# Altium PCB Pulser_10-2023.PcbDoc (part 2 of 2)
Units mm, origin at the board's own origin, x right, y up, seen from the top; angles counter-clockwise.
Board outline 57.93 x 43.58 mm, 4 copper layers (Top Layer, Int1 (GND), Int2 (Power), Bottom Layer), stack 1.56 mm thick; 123 components, 91 nets, 416 pads, 251 vias.
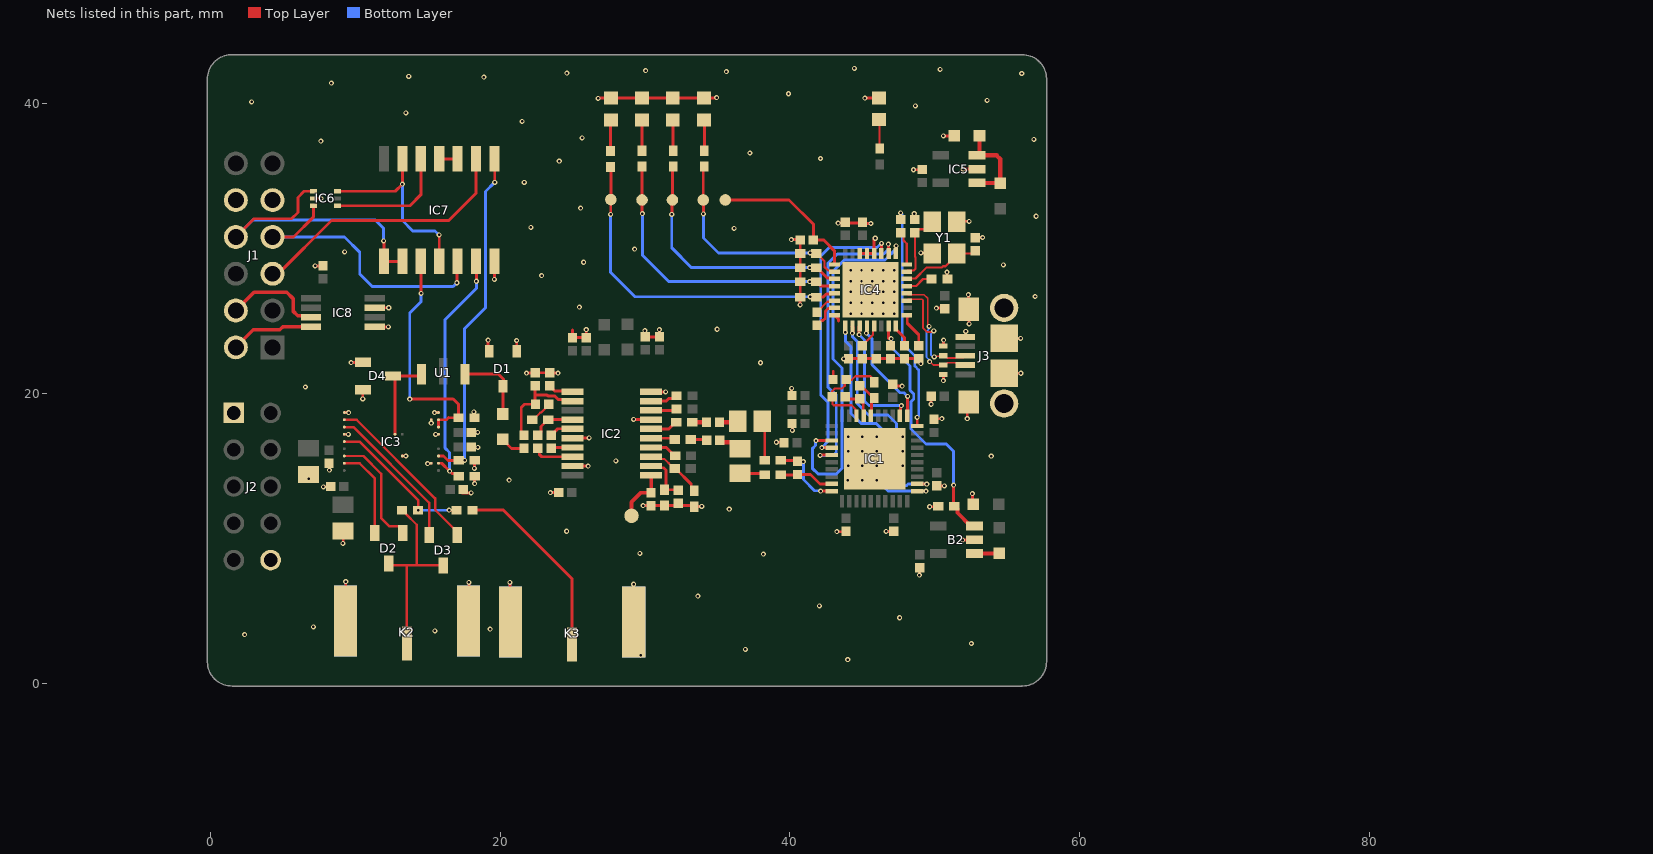
[diagram p4: the nets of this part, all layers, seen from the top]

## Via types
v1: diameter 0.35, hole 0.17, Top Layer to Bottom Layer, tented both sides, 251 vias

## Nets (pads, with @x,y where several pads share a name; then routed paths per layer and width w, separated by ;. In a path a pad name is that pad's centre, name@x,y a point inside that pad or via, vN(x,y) a via of type N, cw(c..) or ccw(c..) an arc to the next point about the centre after c; other vN are vias at no path point) (continued)
GND: B2.2 C1.1 C2.1 C3.2 C4.2 C6.2 C7.1 C10.1 C11.2 C12.2 C13.1 C14.1 C19.1 C20.1 C21.2 C23.1 C24.1 C25.1 C26.1 C27.1 C29.2 C30.2 C31.1 C32.1 C33.1 C34.2 C35.2 C36.1 C39.1 C41.1 C42.2 C43.2 C44.2 C45.2 C46.1 C49.2 C50.2 C51.2 C52.1 C53.1 C54.2 C55.2 C56.2 C58.1 D1.1 D1.2 D4.1 D4.2 D5.1 D6.1 IC1.41 IC2.6 IC2.9 IC2.17 IC2.20 IC3.A1 IC3.A4 IC3.B2 IC3.B8 IC3.F7 IC3.P1 IC3.P4 IC4.8 IC4.28 IC4.29 IC4.30 IC4.33 IC5.2 IC6.2 IC7.7 IC8.5 IC8.7 J1.9 J1.10 J2.1 J2.10 J3.5 J3.MH1 J3.MH2 J3.MP1 J3.MP2 J3.MP3 J3.MP4 K2.2 K3.2 LED1.1 LED2.1 LED3.1 LED4.1 LED5.1 R2.1 R3.2 R4.2 R5.1 R8.2 R12.2 R13.2 R20.2 R21.2 R22.2 R23.2 Y1.2 Y1.4 | length 94.7
  Top Layer w0.2: C50.2@6.775,14.4 6.8,14.375 v1(6.8,14.1) ; IC6.2@7.112,33.452 v1(7.645,33.452) ; v1(7.239,28.804) 7.771,28.804 C6.2@7.775,28.8 ; v1(7.8,13.55) 8.275,13.55 C53.1@8.3,13.575 ; C52.1@8.2,15.175 8.225,15.15 v1(8.225,14.7) ; v1(9.15,9.65) 9.175,9.675 C51.2@9.175,10.5 ; IC3.P4@9.25,17.175 v1(9.525,17.175) ; IC3.P1@9.25,18.675 v1(9.55,18.675) ; K2.2@9.325,4.3 9.35,4.325 v1(9.35,7) ; v1(9.725,22.125) 10.49,22.125 D4.1@10.525,22.16 ; v1(10.525,19.625) D4.2@10.525,20.24 ; IC8.5@11.35,24.6 11.363,24.587 v1(12.294,24.587) ; IC8.7@11.35,25.9 11.358,25.908 v1(12.319,25.908) ; IC3.F7@13.25,15.675 v1(13.5,15.675) ; v1(15,15.15) 15.025,15.175 IC3.B8@15.25,15.175 ; v1(15.25,17.95) IC3.B2@15.25,18.175 ; v1(15.475,18.675) IC3.A1@15.75,18.675 ; v1(15.55,17.175) IC3.A4@15.75,17.175 ; C56.2@17.29,13.208 17.366,13.132 v1(18.009,13.132) ; K2.2@17.825,4.3 17.85,4.325 v1(17.85,6.95) ; C55.2@18.025,16.3 18.05,16.275 v1(18.475,16.275) ; C54.2@18.025,17.3 v1(18.45,17.3) ; v1(18.2,18.725) 18.2,18.35 R23.2@18.225,18.325 ; v1(18.225,14.825) 18.225,15.35 R22.2@18.25,15.375 ; v1(18.25,13.775) R21.2@18.25,14.275 ; v1(19.175,23.675) 19.175,22.975 D1.2@19.25,22.9 ; v1(19.609,27.864) v1(19.609,27.864) IC7.7@19.61,29.112 ; v1(20.675,6.95) 20.675,4.275 K3.2@20.725,4.225 ; D1.1@21.15,22.9 v1(21.15,23.65) ; v1(21.825,21.4) 22.4,21.4 C10.1@22.425,21.425 C7.1@23.425,21.425 23.45,21.4 v1(24,21.4) ; v1(23.475,13.15) C19.1@24.05,13.15 ; IC2.9@24.985,14.985 26.065,14.985 v1(26.075,14.975) ; IC2.6@24.985,16.905 26.13,16.905 v1(26.15,16.925) ; 25,24.375 C25.1@25,23.85 C24.1@25.95,23.85 v1(25.95,24.4) ; v1(26.772,40.361) 26.786,40.375 LED4.1@27.65,40.375 LED3.1@29.8,40.375 LED2.1@31.925,40.375 LED1.1@34.075,40.375 34.85,40.375 34.858,40.383 34.922,40.383 v1(34.95,40.411) ; v1(29.225,18.2) 29.24,18.185 IC2.17@30.415,18.185 ; v1(29.875,12.25) C21.2@30.425,12.25 33.325,12.25 R20.2@33.4,12.175 33.425,12.2 v1(33.925,12.2) ; v1(30,24.325) 30,23.925 C27.1@30.025,23.9 C26.1@31,23.9 v1(31,24.4) ; IC2.20@30.415,20.105 30.42,20.1 v1(31.425,20.1) ; v1(39.075,16.625) 39.575,16.625 C4.2@39.6,16.6 ; v1(40.107,30.607) 40.698,30.607 C13.1@40.723,30.582 40.725,30.58 R3.2@40.725,29.65 R4.2@40.725,28.675 R5.1@40.725,27.7 R12.2@40.725,26.625 40.716,26.616 v1(40.716,26.111) ; v1(40.125,20.35) 40.125,19.875 C11.2@40.15,19.85 ; C12.2@40.15,17.925 40.175,17.9 v1(40.175,17.45) ; C23.1@43,20.825 43,21.5 ; IC4.8@43.075,25.4 43.358,25.117 43.358,24.994 ; v1(43.25,10.45) 43.85,10.45 C14.1@43.875,10.475 ; v1(43.332,31.75) 44.975,31.75 C2.1@45.025,31.8 45.1,31.725 v1(45.593,31.725) ; v1(43.713,22.377) 43.827,22.377 43.95,22.5 C35.2@44.05,22.4 C42.2@45,22.4 C43.2@45.975,22.4 C44.2@46.95,22.4 C45.2@47.925,22.4 C30.2@48.9,22.4 48.928,22.428 49.047,22.309 v1(49.047,22.047) ; IC4.30@44.825,29.65 IC4.29@45.325,29.65 IC4.28@45.825,29.65 45.825,30.636 v1(45.898,30.709) ; v1(45.187,40.386) 45.201,40.4 LED5.1@46.15,40.4 ; v1(46.65,10.475) C39.1@47.175,10.475 ; C29.2@47.1,20.425 47.175,20.5 v1(47.75,20.5) ; v1(48.539,35.433) 49.127,35.433 C34.2@49.148,35.453 ; v1(48.59,32.41) 48.59,32.035 C31.1@48.625,32 ; v1(48.95,7.45) 48.95,7.925 C49.2@48.975,7.95 ; v1(49.047,29.693) 49.782,29.693 Y1.4@49.825,29.65 ; v1(49.65,12.175) 50.225,12.175 R13.2@50.25,12.2 ; v1(49.75,19.25) 49.75,19.775 C58.1@49.775,19.8 ; C36.1@49.95,18.2 50,18.25 v1(50.5,18.25) ; C41.1@49.975,13.625 49.986,13.614 v1(50.673,13.614) ; v1(50.114,25.883) 50.667,25.883 C3.2@50.7,25.85 ; v1(50.597,20.879) 50.597,21.292 D6.1@50.6,21.295 ; v1(50.597,37.77) 50.605,37.778 C46.1@51.348,37.778 ; D5.1@50.6,23.255 50.622,23.277 v1(50.622,23.673) ; v1(50.851,28.372) 50.851,27.924 R2.1@50.875,27.9 ; Y1.2@51.525,31.85 51.552,31.877 v1(52.375,31.877) ; v1(51.925,9.875) 52.725,9.875 B2.2@52.75,9.9 ; v1(51.968,35.458) 51.988,35.478 IC5.2@52.923,35.478 ; J3.5@52.12,23.9 52.146,23.926 v1(52.146,24.282) ; v1(52.25,18.25) 52.25,19.305 J3.MP1@52.345,19.4 ; v1(52.324,26.822) 52.324,25.821 J3.MP2@52.345,25.8 52.375,25.77 v1(52.375,24.79) ; v1(52.6,13.075) 52.6,12.425 C33.1@52.675,12.35 ; C32.1@52.8,30.75 52.809,30.759 v1(53.315,30.759) ; J3.MP3@54.795,21.4 54.808,21.387 v1(55.956,21.387) ; J3.MP4@54.795,23.8 v1(55.931,23.8)
  Bottom Layer w0.2: K2.2@9.325,4.3 9.35,4.325 v1(9.35,7) ; K2.2@17.825,4.3 17.85,4.325 v1(17.85,6.95) ; v1(20.675,6.95) 20.675,4.275 K3.2@20.725,4.225 ; K3.2@29.225,4.225 v1(29.225,6.825)
  other v1: 43.999,1.617 29.699,1.921 36.938,2.328 52.534,2.734 2.369,3.344 15.5,3.598 19.31,3.725 7.118,3.877 47.581,4.512 42.043,5.325 33.661,6.011 38.183,8.906 29.648,8.957 24.594,10.481 35.82,12.005 44,14 45,14 46,14 20.631,14.012 44.051,15 45,15 46,15 47.801,15 27.997,15.333 53.905,15.663 44.051,16 45,16 46,16 47.801,16 44.051,17 45,17 46,17 47.801,17 6.56,20.438 37.979,22.114 34.982,24.426 44.199,25.5 44.949,25.5 45.699,25.5 46.449,25.5 47.199,25.5 25.483,25.95 44.199,26.25 44.949,26.25 45.699,26.25 46.449,26.25 47.199,26.25 56.928,26.686 44.199,27 44.949,27 45.699,27 46.449,27 47.199,27 44.199,27.75 44.949,27.75 45.699,27.75 46.449,27.75 47.199,27.75 22.866,28.134 44.199,28.5 44.949,28.5 45.699,28.5 46.449,28.5 47.199,28.5 54.743,28.871 25.762,29.049 9.277,29.76 29.293,29.963 36.151,31.385 22.13,31.462 57.004,32.224 25.559,32.782 21.673,34.56 24.086,36.034 42.12,36.211 37.243,36.592 7.626,37.405 56.852,37.532 25.66,37.634 21.52,38.777 13.494,39.361 48.673,39.844 2.851,40.123 53.626,40.225 39.91,40.682 8.363,41.418 18.879,41.825 13.697,41.876 56.013,42.079 24.619,42.104 35.617,42.206 30.055,42.282 50.375,42.358 44.456,42.434
GPIO0: GPIO0.1 IC4.2 R3.1 R24.1 | length 15.4
  Top Layer w0.15: R3.1@41.825,29.65 41.875,29.65 42.4,29.125 42.4,28.72 42.645,28.475 43,28.475 IC4.2@43.075,28.4
  Top Layer w0.2: v1(34.036,32.385) 34.03,32.391 34.03,33.345 GPIO0.1@34.025,33.35 34.025,35.575 R24.1@34.1,35.65 ; v1(41.402,29.693) 41.782,29.693 R3.1@41.825,29.65 ; IC4.2@42.85,28.4 IC4.2@43.075,28.4
  Bottom Layer w0.2: v1(34.036,32.385) 34.036,30.734 35.077,29.693 v1(41.402,29.693)
GPIO1: GPIO1.1 IC4.3 R4.1 R25.1 | length 17.8
  Top Layer w0.2: v1(31.852,32.36) 31.876,32.384 31.876,33.326 GPIO1.1@31.9,33.35 31.9,35.6 R25.1@31.95,35.65 ; v1(41.377,28.677) 41.823,28.677 R4.1@41.825,28.675 41.875,28.675 42.6,27.95 43.025,27.95 IC4.3@43.075,27.9
  Bottom Layer w0.2: v1(31.852,32.36) 31.852,30.048 33.223,28.677 v1(41.377,28.677)
GPIO2: GPIO2.1 IC4.4 R5.2 R26.1 | length 20.3
  Top Layer w0.2: R26.1@29.8,35.65 GPIO2.1@29.8,33.35 29.81,33.34 29.81,32.42 v1(29.82,32.41) ; v1(41.377,27.711) 41.814,27.711 R5.2@41.825,27.7 41.875,27.7 42.175,27.4 IC4.4@43.075,27.4
  Bottom Layer w0.2: v1(29.82,32.41) 29.82,29.54 31.648,27.711 v1(41.377,27.711)
GPIO3: GPIO3.1 IC4.5 R12.1 R27.1 | length 23.6
  Top Layer w0.2: R27.1@27.625,35.625 27.65,35.6 GPIO3.1@27.65,33.375 27.643,33.368 27.643,32.367 v1(27.635,32.36) ; v1(41.402,26.67) 41.78,26.67 R12.1@41.825,26.625 41.845,26.645 42.316,26.645 42.522,26.85 43.025,26.85 IC4.5@43.075,26.9
  Bottom Layer w0.2: v1(27.635,32.36) 27.635,28.346 29.312,26.67 v1(41.402,26.67)
I_IN_N: IC1.12 IC4.10 | length 15.8
  Top Layer w0.2: v1(44.323,24.153) 44.375,24.205 44.375,24.545 44.298,24.623 IC4.10@44.325,24.65 ; IC1.12@48.8,13.75 48.804,13.746 49.449,13.746 v1(49.454,13.741)
  Bottom Layer w0.2: v1(44.323,24.153) 44.323,23.901 44.653,23.571 44.653,19.304 45.441,18.517 46.787,18.517 47.375,17.928 47.375,13.763 47.513,13.625 48.042,13.625 48.158,13.741 v1(49.454,13.741)
I_IN_P: IC1.11 IC4.9 | length 16.5
  Top Layer w0.2: IC4.9@43.825,24.65 43.84,24.635 43.833,24.627 43.833,24.214 v1(43.84,24.206) ; IC1.11@48.8,13.25 48.804,13.254 49.399,13.254 v1(49.403,13.259)
  Bottom Layer w0.2: v1(43.84,24.206) 43.84,23.594 44.221,23.213 44.221,18.618 44.907,17.932 45.958,17.932 46.507,17.383 46.507,13.538 46.787,13.259 v1(49.403,13.259)
MOSI: IC8.4 J1.2 | length 5.8
  Top Layer w0.25: J1.2@1.76,23.175 2.969,24.384 4.801,24.384 5.017,24.6 IC8.4@6.95,24.6
NetB2_1: B2.1 FB1.2 | length 1.7
  Top Layer w0.25: B2.1@52.75,8.95 54.425,8.95 FB1.2@54.45,8.975
NetC7_2: C7.2 IC2.1 | length 1.7
  Top Layer w0.2: C7.2@23.425,20.525 23.425,20.52 23.775,20.17 24.92,20.17 IC2.1@24.985,20.105
NetC8_1: C8.1 FB3.2 | length 1.7
  Top Layer w0.2: FB3.2@20.175,16.825 20.8,16.2 C8.1@21.65,16.2
NetC8_2: C8.2 C9.2 C10.2 IC2.2 | length 7.1
  Top Layer w0.2: C8.2@21.65,17.1 21.463,17.287 21.463,19.025 21.688,19.25 C9.2@22.45,19.25 22.425,19.275 22.425,19.817 22.425,19.9 ; C10.2@22.425,20.525 22.425,19.9 ; IC2.2@24.985,19.465 24.865,19.585 24.014,19.585 23.779,19.82 23.297,19.82 23.217,19.9 22.425,19.9
NetC9_1: C9.1 R7.2 | length 1.6
  Top Layer w0.15: R7.2@22.225,18.175 22.275,18.175 22.768,18.668 22.832,18.668 23.1,18.937 23.1,19.005 23.345,19.25 C9.1@23.35,19.25
NetC13_2: C13.2 IC4.1 TP1.1 | length 10.6
  Top Layer w0.2: TP1.1@35.55,33.35 39.954,33.35 41.623,31.681 C13.2@41.623,30.582 42.342,30.582 43.075,29.848 IC4.1@43.075,28.9
NetC15_1: C15.1 C18.2 IC1.27 | length 2.2
  Top Layer w0.2: C15.1@43.833,19.609 44.766,19.609 44.85,19.525 45.07,19.305 45.07,18.48 IC1.27@45.1,18.45
NetC15_2: C15.2 C23.2 IC1.28 R1.1 | length 7
  Top Layer w0.15: C23.2@43.884,20.955 43.79,20.861 43.79,20.523 43.612,20.345 43.115,20.345 42.926,20.156 42.926,19.906 43.002,19.83 C15.2@42.933,19.761 42.94,19.755 42.94,19.265 43.028,19.177 44.266,19.177 44.525,18.918 44.525,18.525 IC1.28@44.6,18.45 ; C23.2@43.957,20.882 44.005,20.93 44.272,20.93 44.526,21.184 45.566,21.184 45.75,21 45.75,20.725 R1.1@45.825,20.65
NetC16_1: C16.1 IC2.7 | length 1.5
  Top Layer w0.2: C16.1@23.525,16.2 23.59,16.265 IC2.7@24.985,16.265
NetC16_2: C16.2 IC2.5 | length 1.7
  Top Layer w0.2: C16.2@23.525,17.1 23.525,17.105 23.978,17.558 24.972,17.558 IC2.5@24.985,17.545
NetC17_1: C17.1 IC2.8 | length 3
  Top Layer w0.2: C17.1@22.6,16.2 22.657,16.143 22.504,15.991 22.666,15.991 22.682,15.975 22.708,15.975 22.708,15.799 22.881,15.625 IC2.8@24.985,15.625
NetC17_2: C17.2 IC2.4 R7.1 | length 3.1
  Top Layer w0.2: C17.2@22.6,17.1 22.82,17.32 22.82,17.72 23.275,18.175 R7.1@23.325,18.175 23.335,18.185 IC2.4@24.985,18.185
NetC18_1: C18.1 IC1.26 R1.2 | length 2.6
  Top Layer w0.2: C18.1@44.831,20.516 44.831,20.511 45.051,20.291 45.155,20.291 45.527,19.918 45.622,19.918 45.822,19.718 R1.2@45.822,19.668 ; C18.1@44.85,20.42 C18.1@44.85,20.425 ; IC1.26@45.6,18.45 45.65,18.5 45.65,19.375 45.825,19.55 R1.2@45.825,19.6
NetC20_2: C20.2 IC2.12 R8.1 | length 3.5
  Top Layer w0.2: IC2.12@30.415,14.985 30.535,14.865 31.287,14.865 31.445,14.707 31.445,13.445 R8.1@31.35,13.35 31.445,13.35 32.261,13.35 C20.2@32.309,13.302
NetC22_2: C22.2 IC4.24 | length 2.4
  Top Layer w0.15: C22.2@47.65,31.1 47.854,30.896 47.854,30.556 48.075,30.335 IC4.24@48.075,28.9
NetC28_1: C28.1 IC4.7 | length 2
  Top Layer w0.2: C28.1@41.875,24.7 41.875,24.705 42.195,25.025 42.299,25.025 42.447,25.174 42.447,25.651 42.646,25.85 43.025,25.85 IC4.7@43.075,25.9
NetC28_2: C28.2 IC4.6 | length 1.5
  Top Layer w0.15: C28.2@41.875,25.6 41.875,25.605 42.595,26.325 43,26.325 IC4.6@43.075,26.4
NetC30_1: C30.1 IC4.17 | length 2.6
  Top Layer w0.2: IC4.17@48.075,25.4 48.159,25.4 48.209,25.35 48.108,25.35 48.108,24.841 48.9,24.049 C30.1@48.9,23.3
NetC31_2: C31.2 IC4.23 Y1.3 | length 4.7
  Top Layer w0.15: IC4.23@48.075,28.4 48.15,28.475 48.553,28.475 48.675,28.597 48.675,29.405 48.641,29.439 48.641,31.084 C31.2@48.625,31.1 48.85,31.325 49.3,31.325 Y1.3@49.825,31.85
NetC32_2: C32.2 IC4.22 Y1.1 | length 5.6
  Top Layer w0.15: IC4.22@48.075,27.9 48.098,27.923 48.675,27.923 49.428,28.677 50.47,28.677 50.565,28.772 50.747,28.772 51.525,29.55 Y1.1@51.525,29.65 52.6,29.65 C32.2@52.8,29.85
NetC37_1: C37.1 L1.1 | length 1.6
  Top Layer w0.3: C37.1@35.172,16.764 35.311,16.625 36.1,16.625 L1.1@36.55,16.175
NetC37_2: C37.2 R16.2 | length 1.1
  Top Layer w0.2: R16.2@33.164,16.815 34.221,16.815 C37.2@34.272,16.764
NetC38_1: C38.1 L2.1 | length 1.3
  Top Layer w0.3: C38.1@35.15,18 36.325,18 L2.1@36.4,18.075
NetC38_2: C38.2 R18.2 | length 1
  Top Layer w0.3: R18.2@33.265,18.009 33.269,18.004 34.246,18.004 C38.2@34.25,18
NetC40_1: C40.1 IC1.39 R17.2 | length 3.8
  Top Layer w0.2: R17.2@39.375,14.375 40.5,14.375 C40.1@40.525,14.4 41.429,14.4 42.079,13.75 IC1.39@42.9,13.75
NetC40_2: C40.2 IC1.40 R19.2 | length 5.1
  Top Layer w0.2: R19.2@39.375,15.375 40.45,15.375 C40.2@40.525,15.3 40.534,15.291 v1(40.945,15.291) ; v1(42.122,13.25) IC1.40@42.9,13.25
  Bottom Layer w0.2: v1(40.945,15.291) 40.945,14.046 41.712,13.279 42.093,13.279 v1(42.122,13.25)
NetC42_1: C42.1 IC4.13 | length 1.7
  Top Layer w0.15: C42.1@45,23.3 45,23.305 45.45,23.755 45.454,23.755 45.75,24.052 45.75,24.575 IC4.13@45.825,24.65
NetC45_1: C45.1 IC4.16 | length 1.6
  Top Layer w0.2: IC4.16@47.325,24.65 47.325,24.425 47.904,23.846 47.904,23.321 C45.1@47.925,23.3
NetC46_2: C46.2 FB2.2 IC5.1 IC5.3 | length 6.4
  Top Layer w0.3: IC5.1@52.923,34.528 52.935,34.516 54.51,34.516 FB2.2@54.523,34.503 54.523,36.181 54.275,36.428 IC5.3@52.948,36.428 ; IC5.3@52.923,36.428 IC5.3@52.948,36.428 ; C46.2@53.098,37.778 53.098,36.578 IC5.3@52.948,36.428
NetD1_3: D1.3 FB3.1 U1.3 | length 5.2
  Top Layer w0.2: U1.3@17.575,21.325 19.9,21.325 20.225,21 20.225,20.525 D1.3@20.2,20.5 20.2,18.6 FB3.1@20.175,18.575
NetD2_1: D2.1 IC3.P7 | length 8.2
  Top Layer w0.17: IC3.P7@9.25,15.675 10.563,15.675 11.786,14.453 11.786,11.405 12.375,10.815 13.045,10.815 13.285,10.575 D2.1@13.285,10.35
NetD2_2: D2.2 IC3.P8 | length 6.3
  Top Layer w0.17: IC3.P8@9.25,15.175 10.301,15.175 11.365,14.111 D2.2@11.365,10.35
NetD2_3: D2.3 D3.3 K2.1 R14.1 | length 13.5
  Top Layer w0.17: D2.3@12.325,8.25 12.437,8.138 13.564,8.138 ; R14.1@13.242,11.938 13.292,11.938 13.507,11.723 13.507,11.673 14.249,10.931 14.249,8.138 ; K2.1@13.575,2.725 13.575,8.127 13.564,8.138 ; D3.3@16.075,8.125 14.263,8.125 14.249,8.138 ; 13.564,8.138 14.249,8.138
NetD3_1: D3.1 IC3.P2 | length 11.7
  Top Layer w0.17: IC3.P2@9.25,18.175 10.095,18.175 15.519,12.751 15.519,11.966 17.035,10.45 D3.1@17.035,10.225
NetD3_2: D3.2 IC3.P3 | length 10.2
  Top Layer w0.17: IC3.P3@9.25,17.675 9.877,17.675 15.115,12.437 D3.2@15.115,10.225
NetIC2_13: IC2.13 R11.2 R20.1 | length 4.1
  Top Layer w0.15: IC2.13@30.415,15.625 30.56,15.48 31.338,15.48 31.646,15.172 31.65,15.172 32.014,14.808 R11.2@32.064,14.808
  Top Layer w0.2: R11.2@32.064,14.808 32.114,14.808 33.2,13.722 33.2,13.475 R20.1@33.4,13.275
NetIC2_14: IC2.14 R10.2 | length 1.9
  Top Layer w0.2: IC2.14@30.415,16.265 31.475,16.265 31.616,16.124 31.616,16.12 32.039,15.697 R10.2@32.089,15.697 ; R10.2@32.131,15.663 R10.2@32.131,15.697
NetIC2_18: IC2.18 R9.2 | length 1.8
  Top Layer w0.2: IC2.18@30.415,18.825 32.093,18.825 R9.2@32.191,18.923
NetIC2_19: IC2.19 R6.2 | length 1.9
  Top Layer w0.2: IC2.19@30.415,19.465 31.475,19.465 31.647,19.637 31.991,19.637 R6.2@32.191,19.837
NetIC3_P5: IC3.P5 R14.2 R15.1 | length 10.1
  Top Layer w0.17: IC3.P5@9.25,16.675 10.3,16.675 14.342,12.633 v1(14.342,11.938) ; v1(16.485,11.938) R15.1@17.001,11.938
  Bottom Layer w0.17: v1(14.342,11.938) v1(16.485,11.938)
NetIC4_21: IC4.21 R2.2 | length 1.9
  Top Layer w0.15: IC4.21@48.075,27.4 48.711,27.4 49.2,27.889 49.764,27.889 R2.2@49.775,27.9
NetIC6_4: IC6.4 IC7.12 | length 8.5
  Top Layer w0.2: IC6.4@8.788,32.952 13.775,32.952 14.53,33.707 IC7.12@14.53,36.188
NetIC6_6: IC6.6 IC7.4 IC7.13 | length 13.7
  Top Layer w0.2: IC6.6@8.788,33.952 12.768,33.952 v1(13.26,34.444) IC7.13@13.26,36.188 ; v1(15.799,30.937) v1(15.799,30.937) IC7.4@15.8,29.112
  Bottom Layer w0.2: v1(13.26,34.444) 13.26,31.927 13.97,31.217 15.519,31.217 v1(15.799,30.937)
NetIC7_10: IC7.10 IC7.11 | length 1.3
  Top Layer w0.2: IC7.11@15.8,36.188 IC7.10@17.07,36.188
NetK3_1: K3.1 R15.2 | length 13.4
  Top Layer w0.2: R15.2@18.101,11.938 20.244,11.938 24.975,7.207 K3.1@24.975,2.65
NetL1_2: L1.2 R17.1 | length 1.8
  Top Layer w0.2: L1.2@36.55,14.475 38.175,14.475 R17.1@38.275,14.375
NetL2_2: L2.2 R19.1 | length 2.8
  Top Layer w0.2: L2.2@38.1,18.075 38.275,17.9 R19.1@38.275,15.375
NetLED1_2: LED1.2 R24.2 | length 2.1
  Top Layer w0.2: LED1.2@34.075,38.875 34.1,38.85 R24.2@34.1,36.75
NetLED2_2: LED2.2 R25.2 | length 2.1
  Top Layer w0.2: LED2.2@31.925,38.875 31.95,38.85 R25.2@31.95,36.75
NetLED3_2: LED3.2 R26.2 | length 2.1
  Top Layer w0.2: R26.2@29.8,36.75 LED3.2@29.8,38.875
NetLED4_2: LED4.2 R27.2 | length 2.2
  Top Layer w0.2: R27.2@27.625,36.725 27.625,38.85 LED4.2@27.65,38.875
NetLED5_2: LED5.2 R28.2 | length 2
  Top Layer w0.15: LED5.2@46.15,38.9 46.2,38.85 R28.2@46.2,36.9
PDamp: IC6.1 IC7.1 IC7.2 J1.8 | length 21.9
  Top Layer w0.2: J1.8@1.76,30.795 1.76,31.021 1.986,31.021 3.02,32.055 5.613,32.055 6.045,32.487 6.045,33.528 6.469,33.952 IC6.1@7.112,33.952 ; v1(11.963,30.531) 11.99,30.504 IC7.1@11.99,29.112 IC7.2@13.26,29.112
  Bottom Layer w0.2: J1.8@1.76,30.795 2.918,31.953 11.405,31.953 11.963,31.394 v1(11.963,30.531)
PDamp_PL: IC3.A2 IC3.A3 IC7.3 R23.1 | length 16.2
  Top Layer w0.17: 16.45,18.325 R23.1@17.125,18.325
  Top Layer w0.2: v1(13.767,19.609) 16.764,19.609 17.125,19.248 R23.1@17.125,18.325 ; IC7.3@14.53,29.112 14.503,29.085 14.554,29.035 v1(14.554,26.899) ; IC3.A3@15.75,17.675 IC3.A2@15.75,18.175 16.3,18.175 16.45,18.325
  Bottom Layer w0.2: v1(13.767,19.609) 13.767,25.552 14.554,26.34 v1(14.554,26.899)
Poff: IC7.9 J1.5 | length 18.7
  Top Layer w0.2: J1.5@4.3,28.255 4.692,28.255 8.365,31.928 16.459,31.928 18.34,33.809 IC7.9@18.34,36.188
Poff_PL: IC3.A7 IC7.8 R22.1 | length 23.6
  Top Layer w0.2: IC3.A7@15.75,15.675 16.1,15.675 16.4,15.375 R22.1@17.15,15.375 17.158,15.367 v1(17.551,15.367) ; IC7.8@19.61,36.188 19.634,36.164 v1(19.634,34.569)
  Bottom Layer w0.2: v1(17.551,15.367) 17.551,24.46 18.999,25.908 18.999,33.934 v1(19.634,34.569)
Pon: IC6.3 IC7.5 J1.7 | length 20.8
  Top Layer w0.2: J1.7@4.3,30.795 5.747,30.795 7.112,32.161 IC6.3@7.112,32.952 ; v1(17.018,27.635) 17.018,29.06 IC7.5@17.07,29.112
  Bottom Layer w0.2: J1.7@4.3,30.795 9.261,30.795 10.312,29.743 10.312,28.245 11.176,27.381 16.764,27.381 v1(17.018,27.635)
Pon_PL: IC3.A8 IC7.6 R21.1 | length 17.3
  Top Layer w0.2: IC3.A8@15.75,15.175 15.975,15.175 v1(16.515,14.635) 16.675,14.475 16.95,14.475 R21.1@17.15,14.275 ; IC7.6@18.34,29.112 18.364,29.088 v1(18.364,27.737)
  Bottom Layer w0.2: v1(16.515,14.635) 16.515,15.912 16.211,16.216 16.211,25.101 18.364,27.254 v1(18.364,27.737)
Q_IN_N: IC1.21 IC4.12 | length 7.6
  Top Layer w0.2: v1(45.288,24.155) 45.307,24.174 45.307,24.595 45.288,24.613 IC4.12@45.325,24.65 ; IC1.21@48.1,18.45 48.126,18.476 48.126,19.78 v1(48.133,19.787)
  Bottom Layer w0.2: v1(45.288,24.155) 45.669,23.774 45.669,21.98 47.608,20.041 47.879,20.041 v1(48.133,19.787)
Q_IN_P: IC1.22 IC4.11 | length 8.8
  Top Layer w0.2: v1(44.78,24.054) 44.78,24.605 IC4.11@44.825,24.65 ; IC1.22@47.6,18.45 47.65,18.5 47.65,19.06 47.701,19.111 v1(47.701,19.152)
  Bottom Layer w0.2: v1(44.78,24.054) 45.161,23.673 45.161,19.456 45.466,19.152 v1(47.701,19.152)
REFCLK: C22.1 IC1.20 | length 15.7
  Top Layer w0.17: C22.1@47.65,32 v1(47.65,32.461) ; v1(48.793,18.339) 48.793,17.757 IC1.20@48.8,17.75
  Bottom Layer w0.17: v1(47.65,32.461) 47.756,32.356 47.756,23.466 48.637,22.584 48.637,21.877 48.893,21.622 48.893,18.438 v1(48.793,18.339)
RX: D4.3 IC3.G4 U1.1 | length 6.1
  Top Layer w0.2: IC3.G4@12.75,17.175 12.75,21.075 D4.3@12.625,21.2 14.45,21.2 U1.1@14.575,21.325
SCLK: IC8.3 J1.4 | length 6.9
  Top Layer w0.25: J1.4@1.76,25.715 1.763,25.715 3.023,26.975 5.283,26.975 5.715,26.543 5.715,25.679 6.044,25.35 6.85,25.35 IC8.3@6.95,25.25
SPI_CLK: IC1.34 IC4.27 | length 19.6
  Top Layer w0.2: v1(42.215,16.256) 42.218,16.253 42.897,16.253 IC1.34@42.9,16.25 ; IC4.27@46.325,29.65 46.33,29.655 v1(46.33,30.353)
  Bottom Layer w0.2: v1(42.215,16.256) 42.647,16.688 42.647,19.38 42.139,19.888 42.139,29.489 42.723,30.074 46.025,30.074 46.304,30.353 v1(46.33,30.353)
SPI_DATA: IC1.35 IC4.26 | length 20.9
  Top Layer w0.2: v1(42.088,15.723) 42.102,15.736 42.886,15.736 IC1.35@42.9,15.75 ; v1(46.812,30.302) 46.812,29.663 IC4.26@46.825,29.65
  Bottom Layer w0.2: v1(42.088,15.723) 43.028,15.723 43.205,15.9 43.205,19.863 42.625,20.443 42.625,28.96 43.282,29.616 46.482,29.616 46.812,29.947 v1(46.812,30.302)
SPI_LAT: IC1.33 IC4.25 | length 25.1
  Top Layer w0.2: v1(41.808,16.739) 41.82,16.75 IC1.33@42.9,16.75 ; IC4.25@47.325,29.65 47.32,29.655 47.346,29.68 v1(47.346,30.175)
  Bottom Layer w0.2: v1(41.808,16.739) 41.78,16.71 41.78,16.405 41.554,16.18 41.554,14.834 41.961,14.427 43.205,14.427 43.612,14.834 43.612,21.742 42.983,22.371 42.983,28.429 43.764,29.21 46.571,29.21 47.346,29.985 v1(47.346,30.175)
USB_N: D6.2 IC4.20 J3.2 | length 8.9
  Top Layer w0.12: IC4.20@48.075,26.9 48.165,26.81 48.46,26.81 48.61,26.81 49.262,26.81 49.52,26.552 49.52,24.696 49.59,24.625 v1(49.619,24.625) ; v1(49.651,22.194) 49.675,22.194 49.914,21.955 D6.2@50.6,21.955 50.725,21.955 50.885,22.115 51.06,22.115 51.435,22.115 51.46,22.09 51.98,22.09 J3.2@52.12,21.95
  Bottom Layer w0.12: v1(49.619,24.625) 49.575,24.581 49.575,24.399 49.431,24.254 49.431,22.507 49.651,22.286 v1(49.651,22.194)
USB_P: D5.2 IC4.19 J3.3 | length 8.3
  Top Layer w0.12: IC4.19@48.075,26.4 48.165,26.49 48.743,26.49 49.13,26.49 49.2,26.42 49.2,24.5 49.459,24.24 49.808,24.24 49.858,24.29 v1@49.92,24.29 ; v1(49.97,22.512) 50.011,22.554 50.559,22.554 D5.2@50.6,22.595 50.725,22.595 50.885,22.435 51.193,22.435 51.435,22.435 51.46,22.46 51.98,22.46 J3.3@52.12,22.6
  Bottom Layer w0.12: v1(49.937,24.307) 49.751,24.122 49.751,22.639 49.878,22.512 v1(49.97,22.512)
V18-SYNTH: B2.3 C44.1 IC4.15 R13.1 | length 17.5
  Top Layer w0.2: IC4.15@46.825,24.65 46.825,23.774 v1(46.99,23.774) ; v1(51.308,13.665) 51.308,12.242 R13.1@51.35,12.2
  Top Layer w0.25: R13.1@51.35,12.2 51.4,12.2 51.575,12.025 51.575,11.75 52.475,10.85 B2.3@52.75,10.85
  Bottom Layer w0.2: v1(46.99,23.774) 46.99,23.192 48.302,21.88 48.302,20.218 48.558,19.963 48.558,19.611 48.368,19.421 48.368,17.545 49.403,16.51 50.8,16.51 51.308,16.002 v1(51.308,13.665)
VCM: C21.1 IC2.11 SP1.1 | length 3.8
  Top Layer w0.25: SP1.1@29.075,11.55 29.075,12.495 29.73,13.15 C21.1@30.425,13.15 30.425,14.335 IC2.11@30.415,14.345
VOH_VGA: IC2.15 R16.1 | length 1.7
  Top Layer w0.17: IC2.15@30.415,16.905 31.973,16.905 R16.1@32.064,16.815
VOL_VGA: IC2.16 R18.1 | length 1.9
  Top Layer w0.2: IC2.16@30.415,17.545 31.652,17.545 32.115,18.009 R18.1@32.165,18.009
pads on no net: B2.4 C5.2 IC1.3 IC1.4 IC1.5 IC1.6 IC1.7 IC1.9 IC1.10 IC1.13 IC1.16 IC1.17 IC1.24 IC1.25 IC1.37 IC1.38 IC5.4 IC8.6 J1.3 J1.6 J1.11 J1.12 J2.3 J2.4 J2.7 J2.8 J3.4 U1.2

## Polygon pours and split planes (outlines as drawn)
+3V3 on Int2 (Power) "+3V3_L03_P017" (solid, pour order 17): 41.758,20.955 41.656,21.057 40.589,21.057 40.589,8.331 40.615,8.302 24.638,8.255 24.638,9.906 21.726,12.912 15.646,12.903 15.259,13.291 15.259,14.649 15.621,15.011 16.866,15.011 17.566,15.711 17.856,15.711 17.856,18.212 16.688,19.38 16.662,19.38 15.164,20.879 13.64,22.276 8.433,22.174 6.579,23.978 6.655,27.203 8.534,29.007 21.463,28.931 21.996,29.007 21.768,43.332 21.768,43.358 56.209,43.358 cw(c56.209,41.884) 57.252,42.926 cw(c56.087,41.761) 57.734,41.761 57.734,34.722 53.797,34.722 53.035,34.112 52.883,27.381 52.807,21.742 50.978,21.717 51.003,20.98 49.835,21.006
2V8 on Int2 (Power) "2V8_L03_P019" (solid, pour order 19): 50.749,9.347 50.749,17.85 50.241,18.358 50.241,20.777 40.818,20.777 40.767,20.726 40.767,8.56 41.072,8.28 49.682,8.28
5V on Int2 (Power) "5V_L03_P001" (solid, pour order 1): 51.067,18.32 50.794,18.593 50.521,18.593 50.368,18.745 50.368,20.599 50.495,20.726 51.283,20.726 51.283,21.463 51.333,21.514 53.086,21.514 53.086,26.086 53.137,33.782 53.823,34.519 57.709,34.519 57.734,1.803 57.734,1.485 cw(c56.173,1.485) 57.277,0.381 57.167,0.271 cw(c56.083,1.355) 56.083,-0.178 1.444,-0.178 cw(c1.444,1.47) 0.279,0.305 cw(c1.383,1.409) -0.178,1.409 -0.178,41.757 cw(c1.419,41.757) 0.29,42.886 0.457,43.052 cw(c1.194,42.316) 1.194,43.358 21.438,43.358 21.438,43.104 21.606,29.366 8.513,29.366 6.401,27.254 6.401,23.622 8.255,21.768 13.614,21.768 16.358,19.025 16.358,18.999 17.399,17.958 17.399,16.002 16.121,15.257 14.956,15.257 14.605,14.907 14.605,13.245 14.845,13.005 14.884,13.005 15.392,12.497 15.596,12.7 21.463,12.751 24.282,9.931 24.282,8.052 50.47,8.052 51.067,8.649
GND on Top Layer "GND_L01_P027" (solid, pour order 27): -0.205,1.446 cw(c1.47,1.475) -0.205,1.447 -0.205,1.446 ccw(c1.47,1.475) 1.497,-0.2 ccw(c1.47,1.475) 1.499,-0.2 1.497,-0.2 55.995,-0.2 ccw(c55.995,0) 56.033,-0.196 ccw(c56.07,0) 56.074,-0.2 ccw(c56.045,1.475) 57.721,1.475 ccw(c56.045,1.475) 57.721,1.502 57.721,41.725 ccw(c57.52,41.725) 57.721,41.729 ccw(c56.045,41.7) 56.039,43.376 ccw(c55.995,43.18) 55.995,43.381 1.445,43.381 ccw(c1.445,43.18) 1.395,43.374 ccw(c1.47,41.7) -0.205,41.674 -0.205,1.45 ccw(c-0.005,1.45)
no net on Top Layer "Top Layer-No Net 4" (none, pour order 25): -0.2,1.446 -0.2,1.447 ccw(c1.475,1.475)
no net on Top Layer "Top Layer-No Net 5" (none, pour order 23): -0.2,1.446 -0.2,1.447 ccw(c1.475,1.475)
no net on Top Layer "Top Layer-No Net 6" (none, pour order 21): -0.2,1.446 -0.2,1.447 ccw(c1.475,1.475)
no net on Top Layer "Top Layer-No Net" (none, pour order 15): -0.15,1.447 cw(c0,1.45) -0.15,1.447 cw(c0,1.45) -0.15,1.447 cw(c0,1.45) -0.15,1.448 cw(c-0.2,1.447) -0.15,1.447 ccw(c1.475,1.475)
no net on Top Layer "Top Layer-No Net 1" (none, pour order 9): -0.15,1.447 cw(c0,1.45) -0.15,1.447 cw(c0,1.45) -0.15,1.447 cw(c0,1.45) -0.15,1.448 cw(c-0.2,1.447) -0.15,1.447 ccw(c1.475,1.475)
no net on Top Layer "Top Layer-No Net 2" (none, pour order 7): -0.15,1.447 cw(c0,1.45) -0.15,1.447 cw(c0,1.45) -0.15,1.447 cw(c0,1.45) -0.15,1.448 cw(c-0.2,1.447) -0.15,1.447 ccw(c1.475,1.475)
no net on Top Layer "Top Layer-No Net 3" (none, pour order 5): -0.15,1.447 cw(c0,1.45) -0.15,1.447 cw(c0,1.45) -0.15,1.447 cw(c0,1.45) -0.15,1.448 cw(c-0.2,1.447) -0.15,1.447 ccw(c1.475,1.475)
no net on Bottom Overlay (none): -0.15,1.447 cw(c0,1.45) -0.15,1.447 cw(c0,1.45) -0.15,1.447 cw(c0,1.45) -0.15,1.448 cw(c-0.2,1.447) -0.15,1.447 ccw(c1.475,1.475)
no net on Mechanical 0 (none): -0.2,1.446 -0.2,1.447 ccw(c1.475,1.475)
no net on Mechanical 0 (none): -0.2,1.446 cw(c1.475,1.475) -0.2,1.447
no net on Mechanical 0 (none): -0.15,1.447 cw(c0,1.45) -0.15,1.447 cw(c0,1.45) -0.15,1.447 cw(c0,1.45) -0.15,1.448 cw(c-0.2,1.447) -0.15,1.447 ccw(c1.475,1.475)
no net on Mechanical 0 (none): -0.15,1.447 cw(c0,1.45) -0.15,1.447 cw(c0,1.45) -0.15,1.447 cw(c0,1.45) -0.15,1.448 cw(c-0.2,1.447) -0.15,1.447 ccw(c1.475,1.475)
GND on Int1 (GND) "GND_L02_P000" (solid, pour order 0): -0.2,1.446 cw(c1.475,1.475) -0.2,1.447 -0.2,1.446 ccw(c1.475,1.475) 1.501,-0.2 ccw(c1.475,1.475) 1.503,-0.2 1.501,-0.2 56,-0.2 ccw(c56,0) 56.037,-0.197 ccw(c56.075,0) 56.078,-0.2 ccw(c56.05,1.475) 57.726,1.475 ccw(c56.05,1.475) 57.725,1.502 57.725,41.725 ccw(c57.525,41.725) 57.725,41.728 ccw(c56.05,41.7) 56.044,43.376 ccw(c56,43.18) 56,43.38 1.45,43.38 ccw(c1.45,43.18) 1.399,43.374 ccw(c1.475,41.7) -0.2,41.674 -0.2,1.45 ccw(c0,1.45)
GND on Bottom Layer "GND_L04_P029" (solid, pour order 29): -0.206,1.459 cw(c1.469,1.489) -0.206,1.46 -0.206,1.459 ccw(c1.469,1.489) 1.496,-0.187 ccw(c1.469,1.489) 1.498,-0.187 1.496,-0.187 55.994,-0.187 ccw(c55.994,0.014) 56.032,-0.183 ccw(c56.069,0.014) 56.073,-0.187 ccw(c56.044,1.489) 57.72,1.489 ccw(c56.044,1.489) 57.72,1.516 57.72,41.739 ccw(c57.519,41.739) 57.72,41.742 ccw(c56.044,41.714) 56.038,43.389 ccw(c55.994,43.194) 55.994,43.394 1.444,43.394 ccw(c1.444,43.194) 1.394,43.388 ccw(c1.469,41.714) -0.206,41.687 -0.206,1.464 ccw(c-0.006,1.464)

## Silkscreen, mask and mechanical layers (free items; w line width, h text height)
Bottom Overlay:
  lines w0.2: 5.5,24.5 10.7,24.5 ; 5.5,27 10.7,27 ; 5.5,29.6 10.8,29.6 ; 5.5,32.1 10.8,32.1 ; 5.5,34.6 10.8,34.6 ; 5.7,9.7 9.6,9.7 ; 5.7,12.3 9.6,12.3 ; 5.7,14.8 9.6,14.8 ; 5.7,17.4 9.6,17.4 ; 7.7,7.3 7.7,20 ; 8.25,21.8 8.3,36.6 ; 5.5,21.8 5.5,36.6 10.839,36.6 10.739,21.8 5.5,21.8 ; 5.7,7.3 9.7,7.3 9.7,20 5.7,20 5.7,7.3
  text "X" at 6.7,35.3 h1
  text "X" at 9.3,35.3 h1
  text "GND" at 8.8,33.1 h0.75
  text "GND" at 5.7,33 h0.75
  text "PDamp" at 5.8,30.6 h0.75
  text "Pon" at 9,30.6 h0.75
  text "Poff" at 8.9,28.1 h0.75
  text "X" at 6.1,28 h1
  text "SCLK" at 6.1,25.4 h0.75
  text "X" at 9,25.3 h1
  text "MOSI" at 6,22.9 h0.75
  text "CS" at 9.1,22.9 h0.75
  text "GND" at 6,18.3 h0.75
  text "5V" at 8.3,18.3 h0.75
  text "X" at 6.4,15.8 h1
  text "X" at 8.4,15.8 h1
  text "+HV" at 6,13.3 h0.75
  text "5V" at 8.3,13.3 h0.75
  text "X" at 6.4,10.7 h1
  text "X" at 8.4,10.7 h1
  text "-HV" at 6.1,8.3 h0.75
  text "GND" at 8,8.3 h0.75
Mechanical 0:
  region: -0.2,1.446 -0.2,1.447 ccw(c1.475,1.475)
  lines w0.1: -0.2,1.446 ccw(c1.475,1.475) 1.501,-0.2 ; -0.2,1.446 cw(c1.475,1.475) -0.2,1.447 -0.2,1.446 ; -0.2,1.446 cw(c0,1.45) -0.2,1.45 -0.2,41.3 -0.2,41.674 cw(c1.475,41.7) 1.399,43.374 cw(c1.45,43.18) 1.45,43.38 56,43.38 cw(c56,43.18) 56.044,43.376 ; 1.501,-0.2 ccw(c1.475,1.475) 1.503,-0.2 1.501,-0.2 ; 1.501,-0.2 56,-0.2 ccw(c56,0) 56.037,-0.197 ccw(c56.075,0) 56.078,-0.2 ; 56.044,43.376 cw(c56.05,41.7) 57.725,41.728 ; 56.044,43.376 56.044,43.376 ; 56.078,-0.2 ccw(c56.05,1.475) 57.726,1.475 ccw(c56.05,1.475) 57.725,1.502 57.725,41.725 ccw(c57.525,41.725) 57.725,41.728 ; 56.078,-0.2 56.078,-0.2 ; 57.725,41.728 57.725,41.728
Mechanical 8:
  lines w0.1: -0.178,1.409 ccw(c1.383,1.409) 0.279,0.305 ccw(c1.445,1.47) 1.445,-0.178 56.083,-0.178 ccw(c56.083,1.355) 57.167,0.271 57.277,0.381 ccw(c56.173,1.485) 57.734,1.485 57.734,1.803 57.709,34.519 53.823,34.519 53.137,33.782 53.086,26.086 52.4,25.527 50.292,25.502 49.86,24.816 49.809,20.955 48.844,20.091 35.814,20.066 35.027,20.853 34.696,25.273 33.401,26.416 29.997,26.365 22.657,26.213 21.641,26.543 21.438,43.104 21.438,43.358 1.194,43.358 ccw(c1.194,42.315) 0.457,43.052 0.29,42.886 ccw(c1.419,41.757) -0.178,41.757 -0.178,41.315 -0.178,1.409